# Altium PCB AFE.PcbDoc
Units mm, origin at the board's own origin, x right, y up, seen from the top; angles counter-clockwise.
Board outline 34.75 x 42.75 mm, 4 copper layers (Top layer, Ground, Power, Bottom Layer), stack 1.586 mm thick; 61 components, 37 nets, 155 pads, 295 vias.
Unrouted connection lines stored in the file: 1.
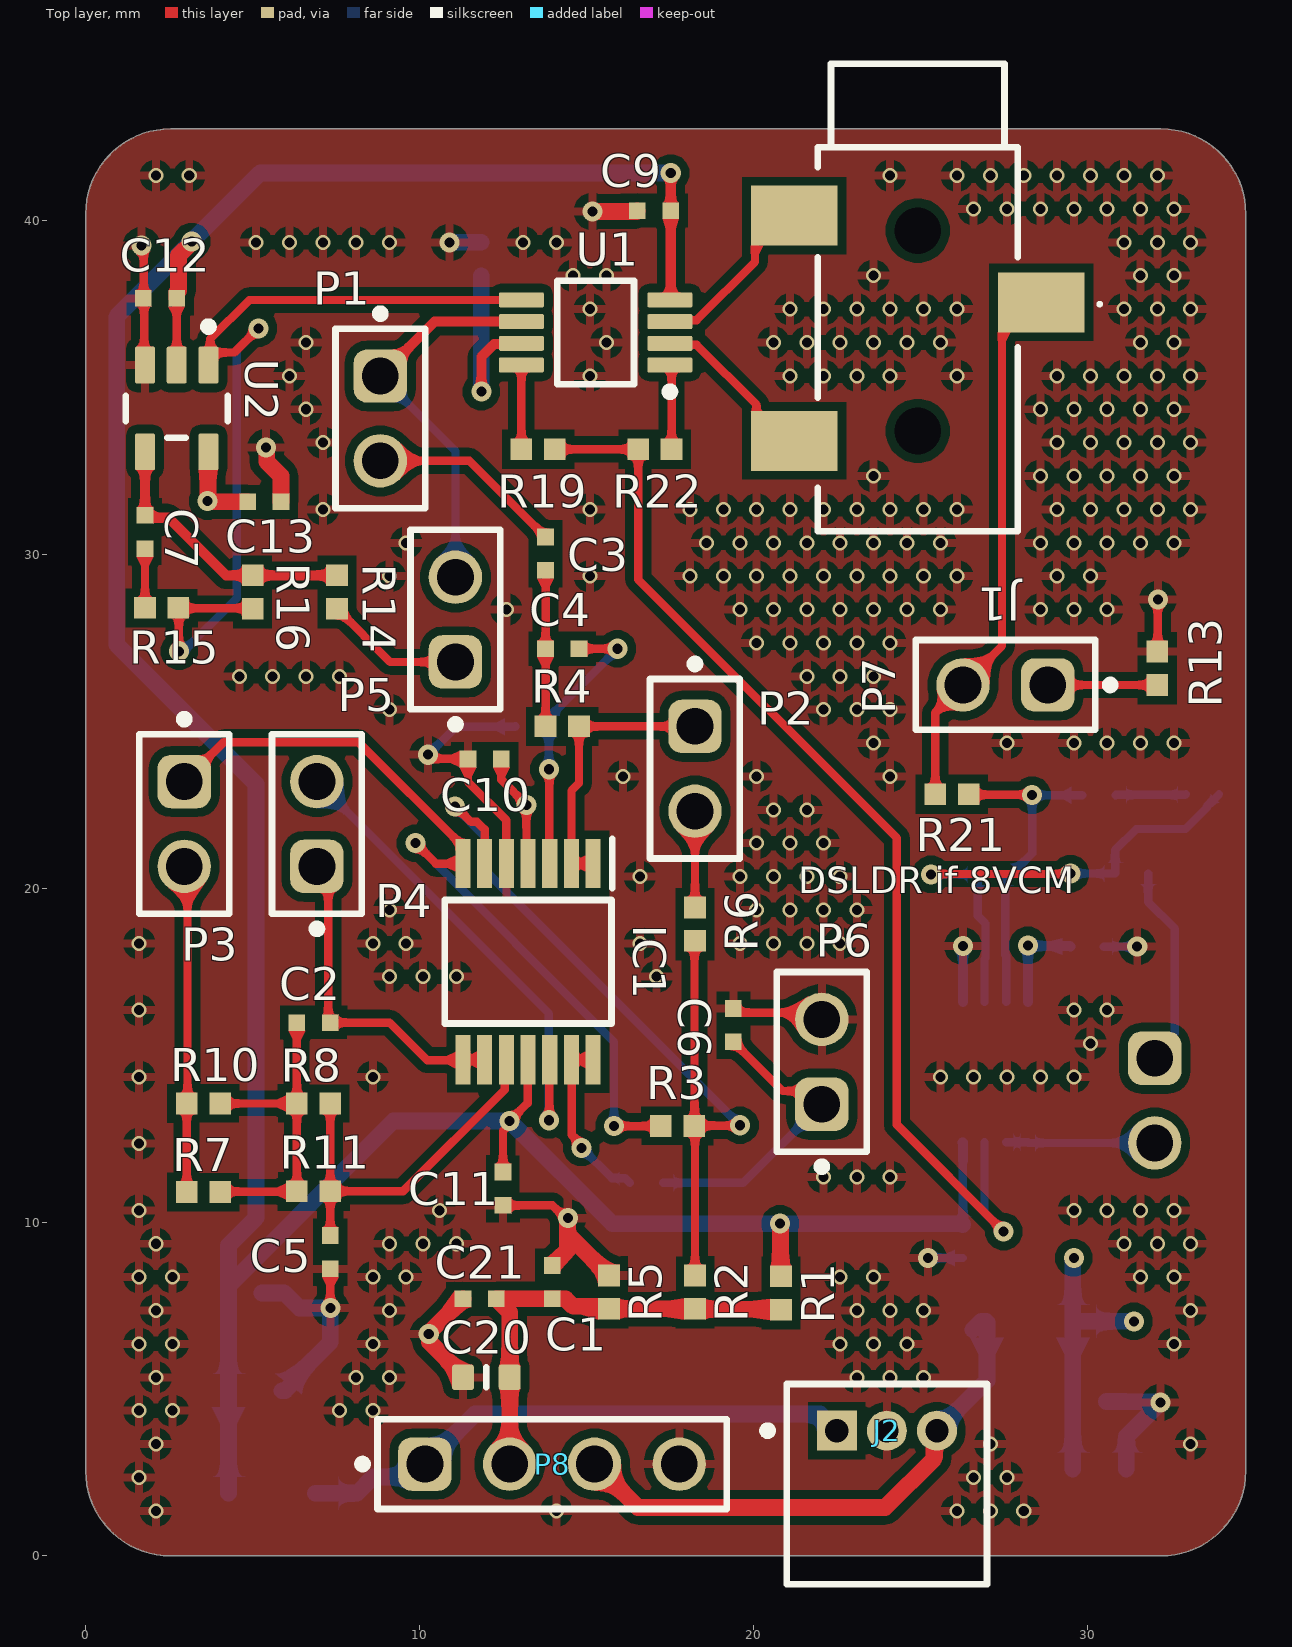
[diagram p0: Top layer view]
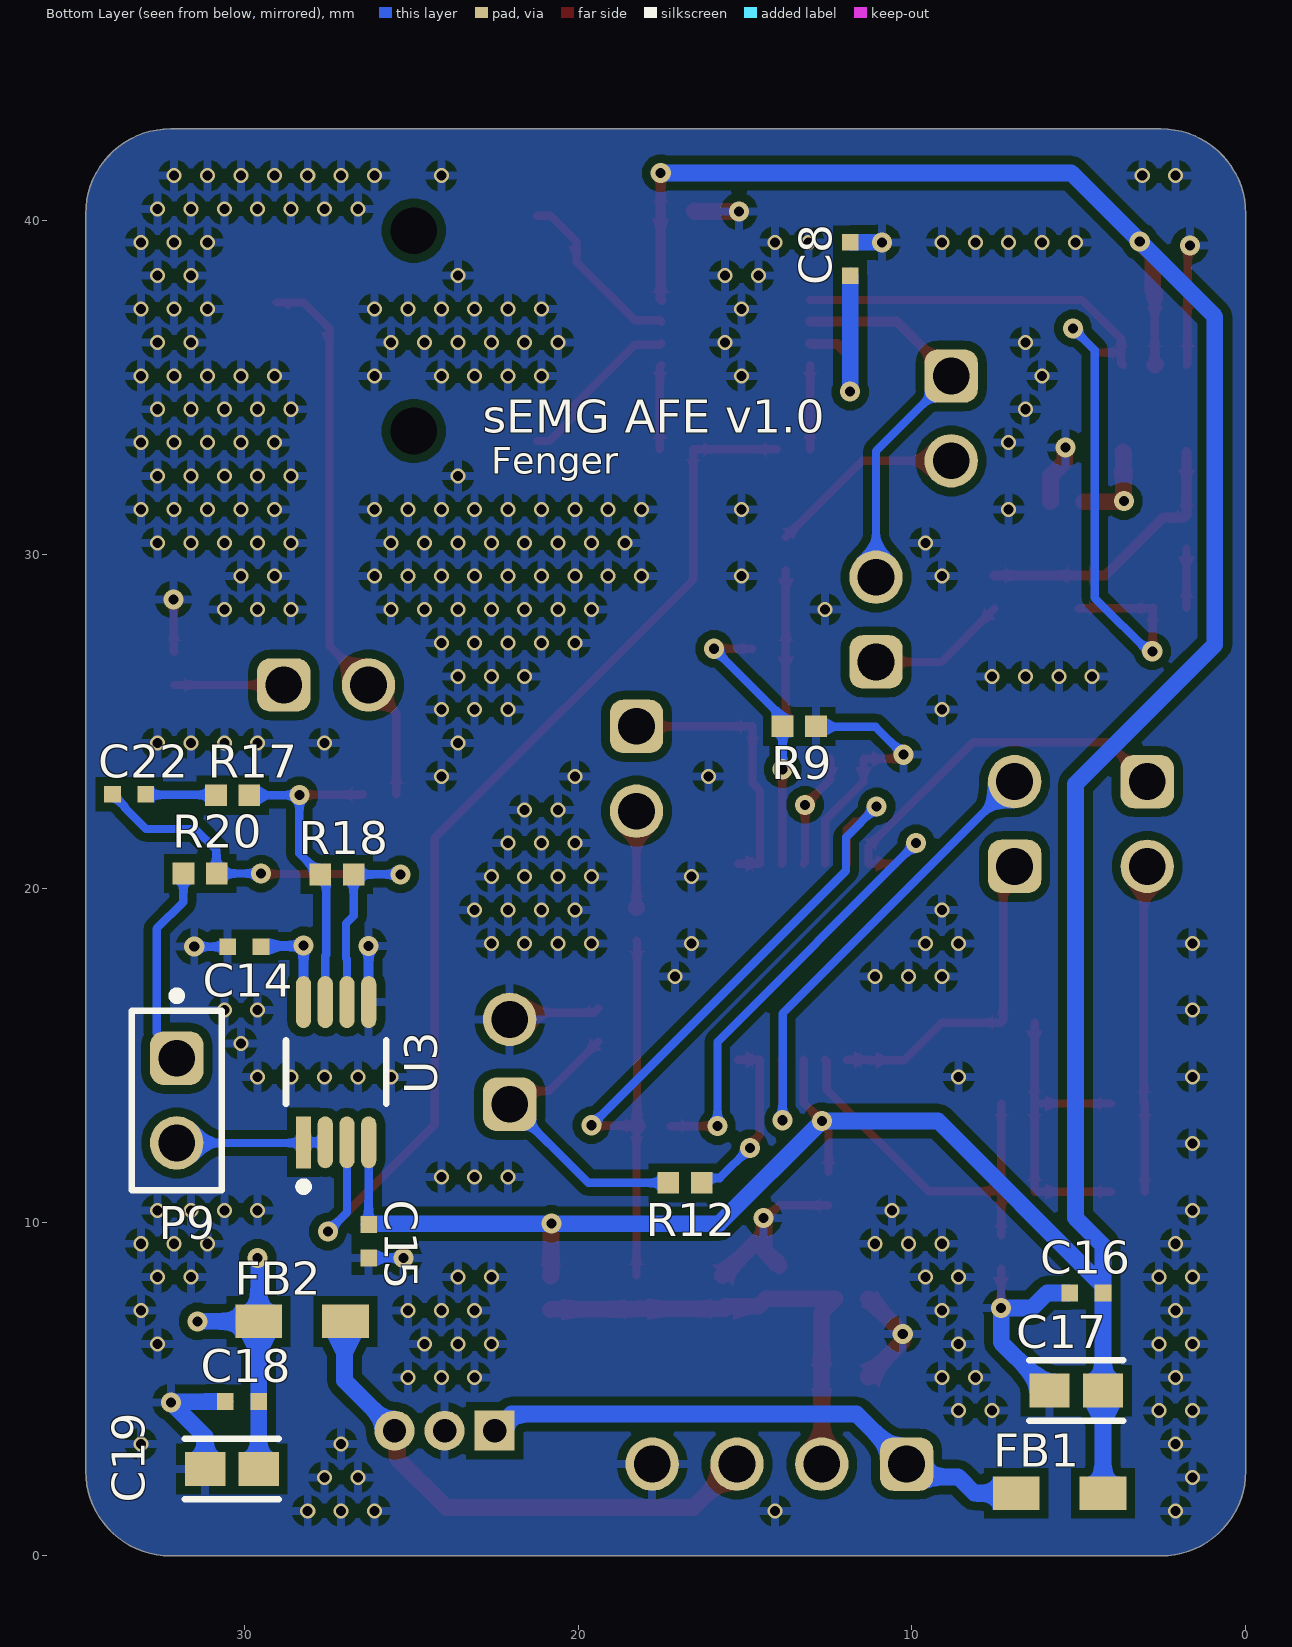
[diagram p1: Bottom Layer view, seen from below]
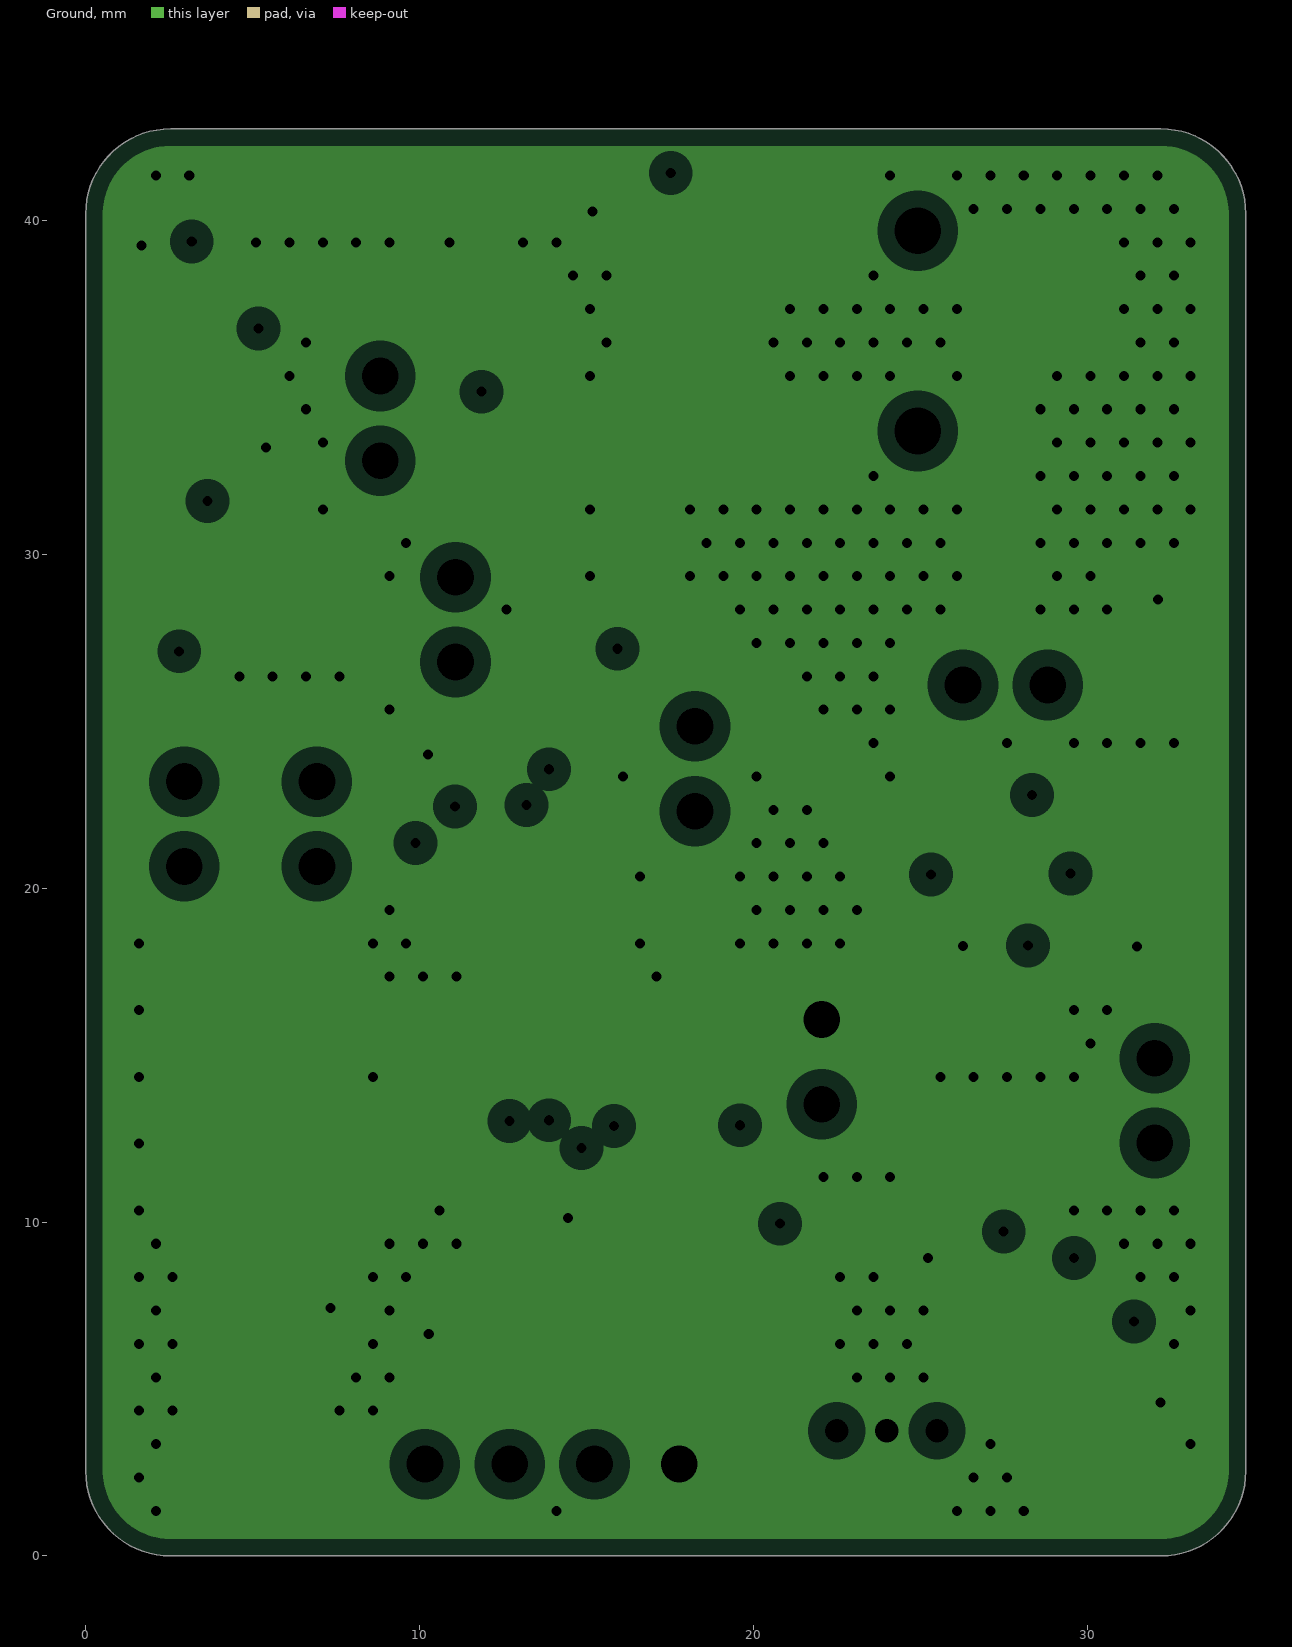
[diagram p2: Ground, clearances drawn from the general rule]
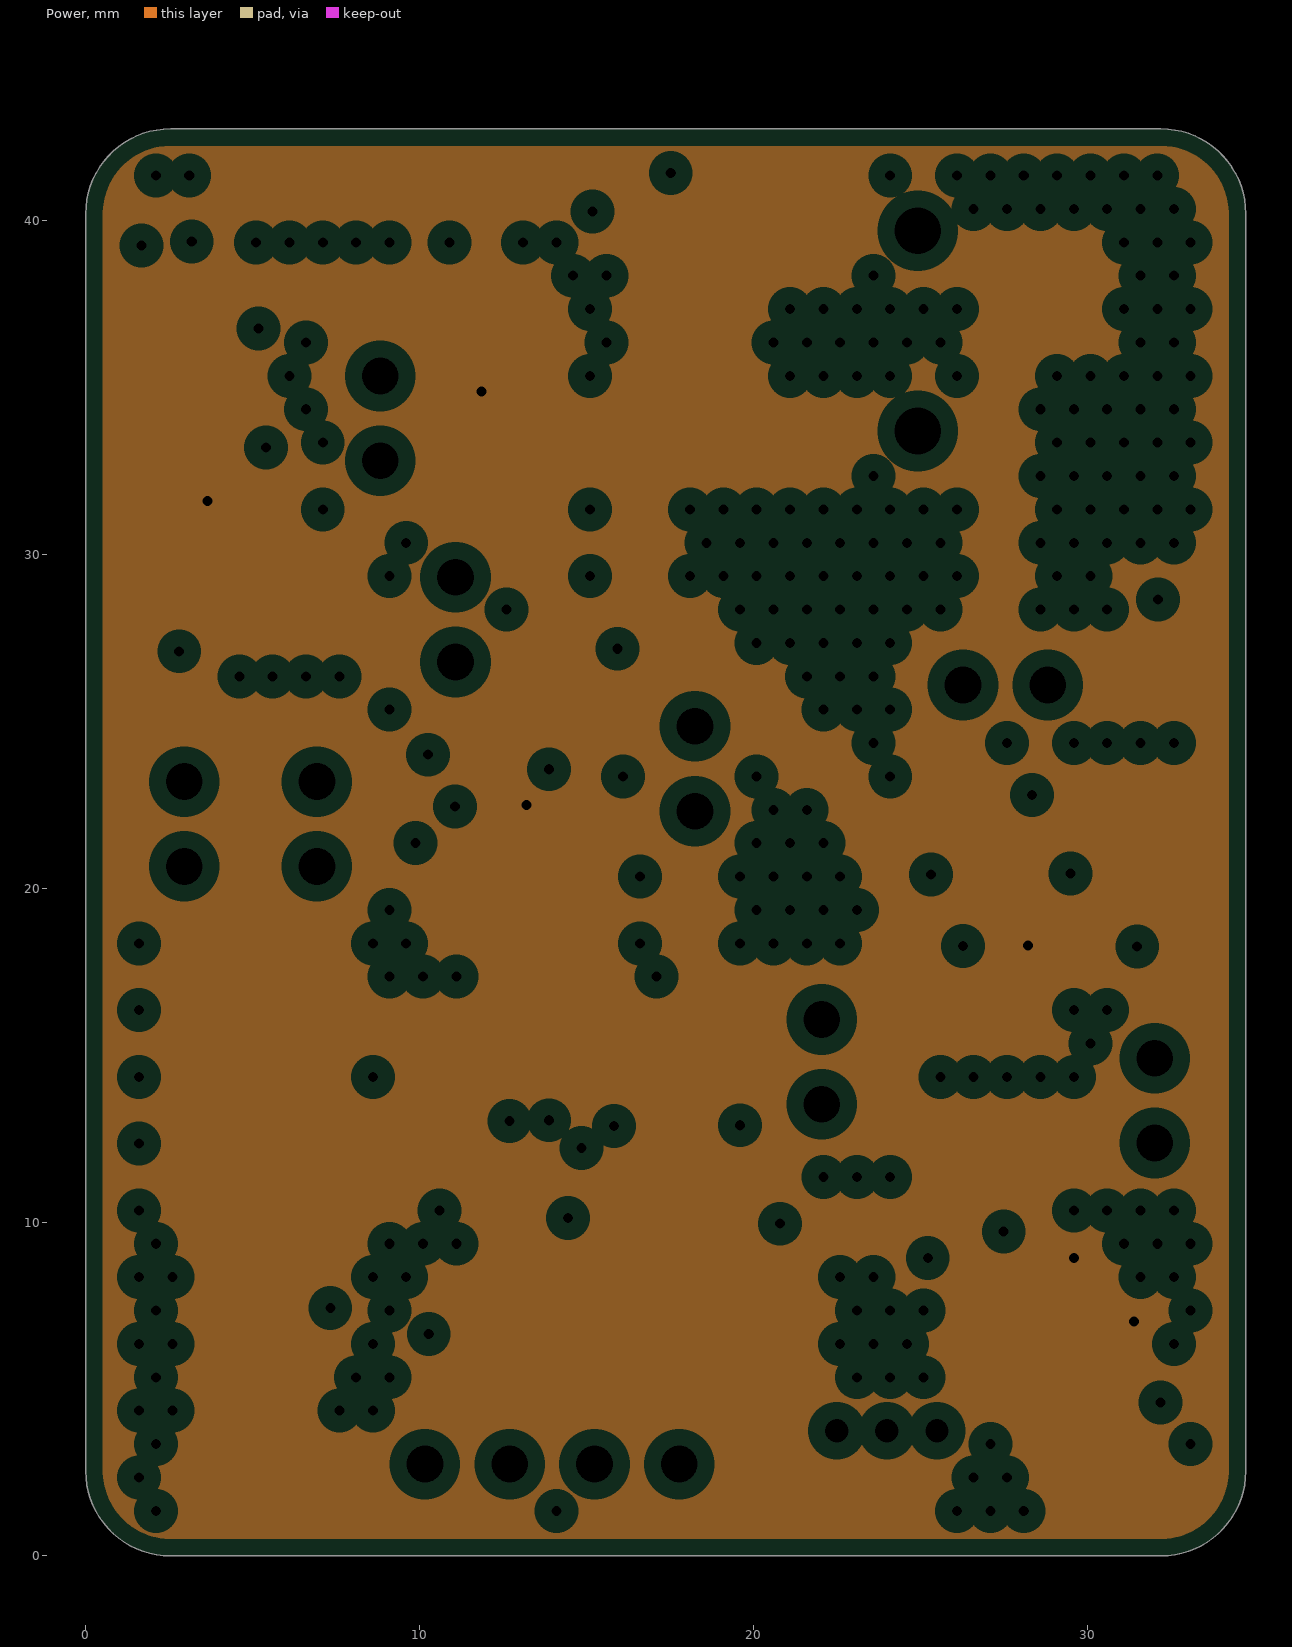
[diagram p3: Power, clearances drawn from the general rule]
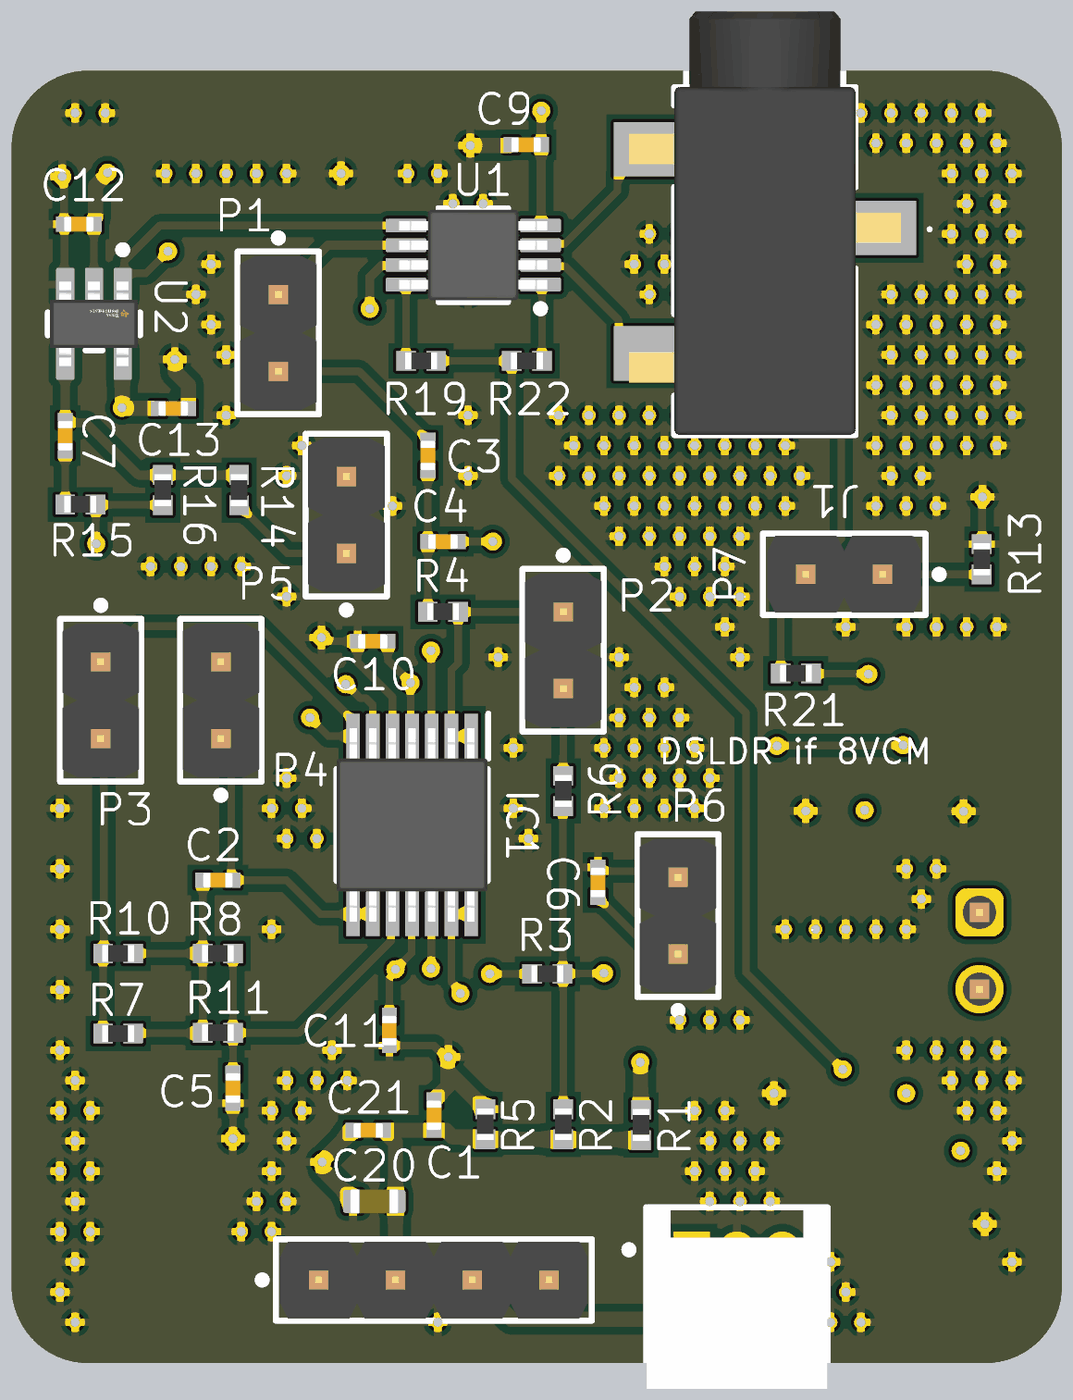
[diagram p4: 3D render of the assembled board from above, using the file's embedded part models]
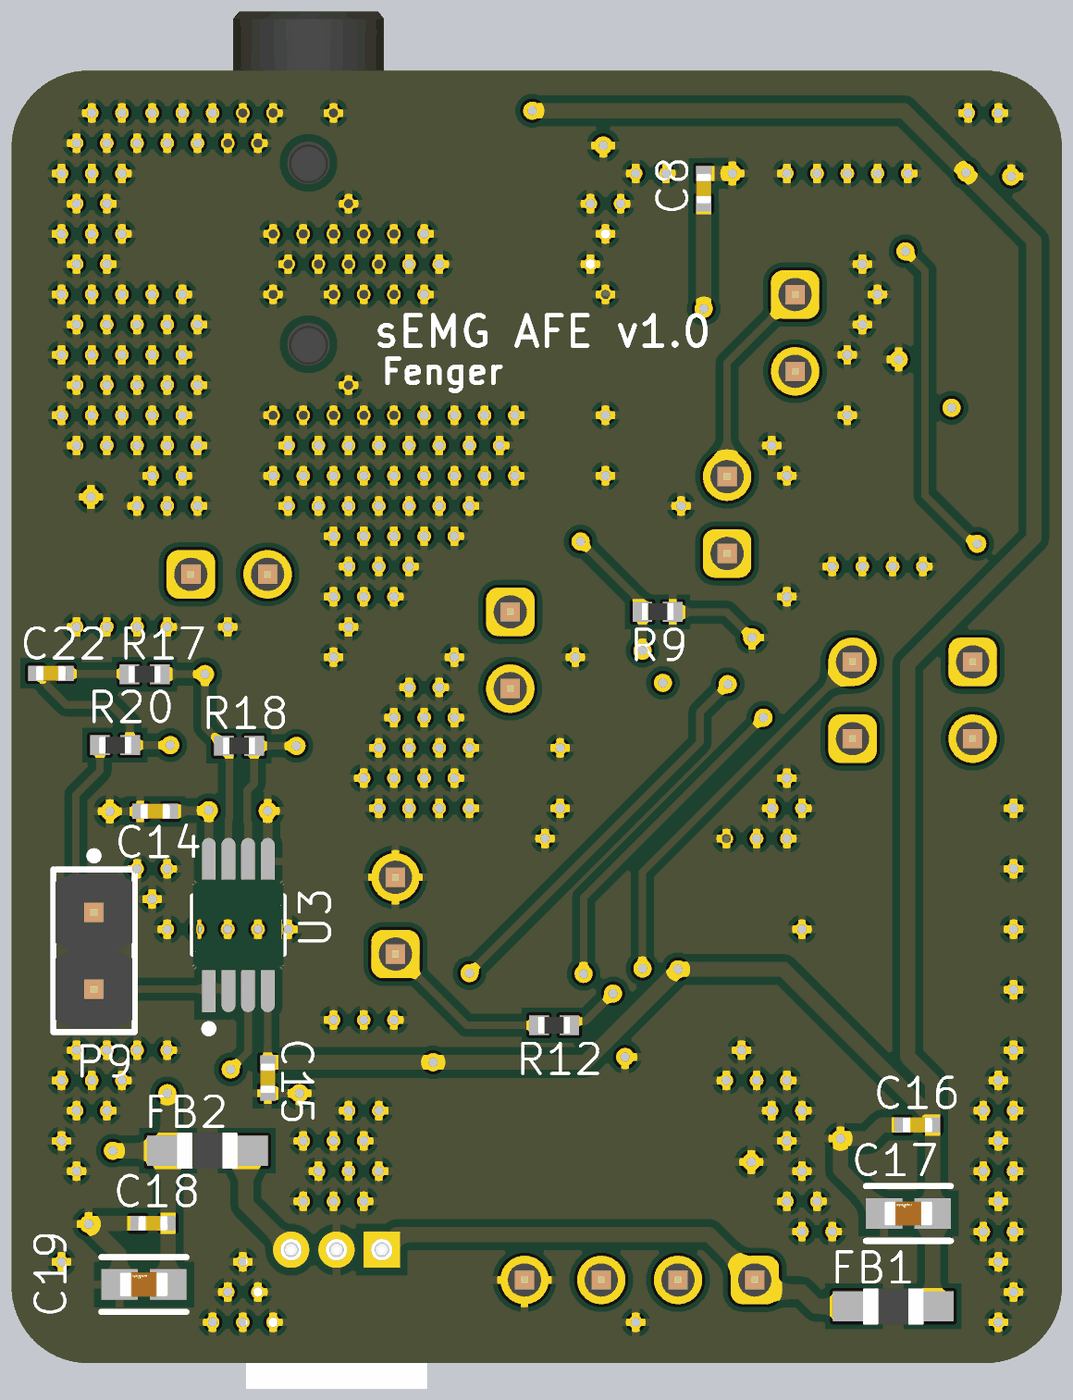
[diagram p5: 3D render of the assembled board from below, using the file's embedded part models]

## Layer stack, top to bottom
Top Solder: solder mask 0.0102, Solder Resist, Dk 3.5
Top layer: signal copper 0.035
Dielectric 2: prepreg 0.2104, PP-006, Dk 4.1
Ground: plane copper 0.0152, net GND
Dielectric 1: core 1.065, FR-4, Dk 4.6
Power: plane copper 0.0152, net +2.5V
Dielectric 3: prepreg 0.2104, PP-006, Dk 4.1
Bottom Layer: signal copper 0.035
Bottom Solder: solder mask 0.0102, Solder Resist, Dk 3.5

## Board outline
0,40.21 cw(c2.54,40.21) 2.54,42.75 32.21,42.75 cw(c32.21,40.21) 34.75,40.21 34.75,2.54 cw(c32.21,2.54) 32.21,0 2.54,0 cw(c2.54,2.54) 0,2.54 0,29.25

## Design rules (kind name [scope] priority, off if disabled: settings)
Clearance [All] p1: gap=0.254 ignorepadtopadclearanceinfootprint=FALSE except(0.192: SMDPad-SMDPad)
MinimumSolderMaskSliver [All] p1: minsoldermaskwidth=0.1
PlaneClearance [All] p1: clearance=0.508
PlaneConnect [All] p1: planeconnectstyle=Direct reliefexpansion=0.508 reliefentries=4 reliefconductorwidth=0.254 reliefairgap=0.254
PolygonConnect [All] p1: connectstyle=Relief reliefconductorwidth=0.254 reliefentries=4 polygonreliefangle="90 Angle" airgapwidth=0.254
RoutingVias [All] p1: holewidth=0.3 width=0.6 viastyle="Through Hole" minholewidth=0.15 minwidth=0.25 maxholewidth=1 maxwidth=1
SilkToSilkClearance [All] p1: silktosilkclearance=0.15
SilkToSolderMaskClearance [IsPad] p1: minsilkscreentomaskgap=0.15 clearancetoexposedcopper=TRUE
SolderMaskExpansion [All] p1: expansion=0.102 istentingtop=FALSE
SupplyNets "Schematic Supply Nets_1" [InNet('-2.5V')] p1: voltage=0.000
SupplyNets "Schematic Supply Nets" [InNet('+2.5V')] p2: voltage=0.000
SupplyNets "Schematic Supply Nets_7" [InNet('-1.25V_IN')] p3: voltage=0.000
SupplyNets "Schematic Supply Nets_2" [InNet('GND')] p4: voltage=0.000
Width [All] p1: maxlimit=1 minlimit=0.1 preferedwidth=0.25 minimp=50.000000 maximp=50.000000 favimp=50.000000
25 further rules are at their usual default settings.

## Classes and differential pairs
component class AFE_Power: C16 C17 C18 C19 C20 C21 FB1 FB2 J2 P8
component class AFE_Main: C1 C2 C3 C4 C5 C6 C7 C8 C9 C10 C11 C12 C13 IC1 J1 P1 P2 P3 P4 P5 P6 P7 R1 R2 R3 R4 R5 R6 R7 R8 R9 R10 R11 R12 R13 R14 R15 R16 U1 U2
component class AFE_DRL: C14 C15 C22 P9 R17 R18 R19 R20 R21 R22 U3

## Components (designator, comment, footprint, x,y, rotation, side; value= is the part's Value field where it differs from the comment)
C1 "100n" WCAP-CSGP_0402_L1W0.5H0.5 13.975,8.2 r270 top
C2 "20.5n" WCAP-CSGP_0402_L1W0.5H0.5 6.825,15.975 r0 top
C3 "82n" WCAP-CSGP_0402_L1W0.5H0.5 13.775,30.025 r270 top
C4 "82n" WCAP-CSGP_0402_L1W0.5H0.5 14.275,27.175 r0 top
C5 "10n" WCAP-CSGP_0402_L1W0.5H0.5 7.325,9.1 r270 top
C6 "0" WCAP-CSGP_0402_L1W0.5H0.5 19.4,15.9 r270 top
C7 "1u" WCAP-CSGP_0402_L1W0.5H0.5 1.775,30.675 r90 top
C8 "100n" WCAP-CSGP_0402_L1W0.5H0.5 11.85,38.85 r90 bottom
C9 "100n" WCAP-CSGP_0402_L1W0.5H0.5 17.025,40.3 r0 top
C10 "100n" WCAP-CSGP_0402_L1W0.5H0.5 11.95,23.875 r180 top
C11 "100n" WCAP-CSGP_0402_L1W0.5H0.5 12.5,11 r270 top
C12 "100n" WCAP-CSGP_0402_L1W0.5H0.5 2.225,37.675 r180 top
C13 "100n" WCAP-CSGP_0402_L1W0.5H0.5 5.35,31.575 r180 top
C14 "100n" WCAP-CSGP_0402_L1W0.5H0.5 30,18.25 r0 bottom
C15 "100n" WCAP-CSGP_0402_L1W0.5H0.5 26.275,9.425 r90 bottom
C16 "1u" WCAP-CSGP_0402_L1W0.5H0.5 4.775,7.875 r180 bottom
C17 "10uF" FP-GRM188-0_1-e0_2_0_55-IPC_A 5.077,4.95 r0 bottom
C18 "1u" WCAP-CSGP_0402_L1W0.5H0.5 30.071,4.625 r180 bottom
C19 "10uF" FP-GRM188-0_1-e0_2_0_55-IPC_A 30.373,2.6 r0 bottom
C20 "Capacitor 10µF +/-20% 10V 0603" CAPC0603(1608)100_L 12,5.35 r0 top value=10µF
C21 "1u" WCAP-CSGP_0402_L1W0.5H0.5 11.8,7.7 r0 top
C22 "1n" WCAP-CSGP_0402_L1W0.5H0.5 33.45,22.815 r0 bottom
FB1 "742792097" WE-CBF_0805_L2W1.2H0.9_HC 5.575,1.875 r180 bottom
FB2 "742792097" WE-CBF_0805_L2W1.2H0.9_HC 28.271,7.025 r0 bottom
IC1 "OPA4387PWR" SOP65P640X120-14N 13.25,17.8 r270 top
J1 "35RASMT2BHSNTRX" 35RASMT2BHSNTRX 24.925,37.7 r270 top
J2 "S3B-ZR(LF)(SN)" FP-S3B-ZR_LF_SN-MFG 24,2.15 r0 top
P1 "61300211121" 61300211121 8.825,34.075 r270 top
P2 "61300211121" 61300211121 18.25,23.58 r270 top
P3 "61300211121" 61300211121 2.95,21.925 r270 top
P4 "61300211121" 61300211121 6.925,21.925 r90 top
P5 "61300211121" 61300211121 11.075,28.05 r90 top
P6 "61300211121" 61300211121 22.05,14.8 r90 top
P7 "61300211121" 61300211121 27.55,26.09 r180 top
P8 "61300411121" 61300411121 13.97,2.75 r0 top
P9 "61300211121" 61300211121 32.025,13.64 r270 bottom
R1 "Resistor 4k7 +/-1% 0402 63 mW" RESC1005X40X25ML05T05 20.825,7.875 r270 top value=4k
R2 "Resistor 4k7 +/-1% 0402 63 mW" RESC1005X40X25ML05T05 18.25,7.9 r270 top value=47k
R3 "Resistor 4k7 +/-1% 0402 63 mW" RESC1005X40X25ML05T05 17.725,12.875 r0 top value=47k
R4 "Resistor 4k7 +/-1% 0402 63 mW" RESC1005X40X25ML05T05 14.275,24.85 r180 top value=68.7k
R5 "Resistor 4k7 +/-1% 0402 63 mW" RESC1005X40X25ML05T05 15.675,7.9 r90 top value=4k
R6 "Resistor 4k7 +/-1% 0402 63 mW" RESC1005X40X25ML05T05 18.25,18.925 r90 top value=1.21k
R7 "Resistor 4k7 +/-1% 0402 63 mW" RESC1005X40X25ML05T05 3.525,10.9 r180 top value=4.75k
R8 "Resistor 4k7 +/-1% 0402 63 mW" RESC1005X40X25ML05T05 6.825,13.55 r180 top value=6.49k
R9 "Resistor 4k7 +/-1% 0402 63 mW" RESC1005X40X25ML05T05 13.375,24.85 r0 bottom value=137k
R10 "Resistor 4k7 +/-1% 0402 63 mW" RESC1005X40X25ML05T05 3.525,13.55 r180 top value=0
R11 "Resistor 4k7 +/-1% 0402 63 mW" RESC1005X40X25ML05T05 6.825,10.925 r180 top value=0
R12 "Resistor 4k7 +/-1% 0402 63 mW" RESC1005X40X25ML05T05 16.8,11.175 r180 bottom value=0
R13 "Resistor 4k7 +/-1% 0402 63 mW" RESC1005X40X25ML05T05 32.1,26.59 r90 top value=1Meg
R14 "Resistor 4k7 +/-1% 0402 63 mW" RESC1005X40X25ML05T05 7.525,28.875 r270 top value=100k
R15 "Resistor 4k7 +/-1% 0402 63 mW" RESC1005X40X25ML05T05 2.275,28.4 r0 top value=0
R16 "Resistor 4k7 +/-1% 0402 63 mW" RESC1005X40X25ML05T05 5,28.875 r270 top value=0
R17 "Resistor 4k7 +/-1% 0402 63 mW" RESC1005X40X25ML05T05 30.35,22.785 r0 bottom value=0
R18 "Resistor 4k7 +/-1% 0402 63 mW" RESC1005X40X25ML05T05 27.225,20.415 r180 bottom value=1Meg
R19 "Resistor 4k7 +/-1% 0402 63 mW" RESC1005X40X25ML05T05 13.55,33.15 r180 top value=10k
R20 "Resistor 4k7 +/-1% 0402 63 mW" RESC1005X40X25ML05T05 31.325,20.44 r180 bottom value=10k
R21 "Resistor 4k7 +/-1% 0402 63 mW" RESC1005X40X25ML05T05 25.95,22.815 r180 top value=1Meg
R22 "Resistor 4k7 +/-1% 0402 63 mW" RESC1005X40X25ML05T05 17.05,33.15 r0 top value=10k
U1 "INA333AIDGKR" DGK0008A_N 15.275,36.65 r180 top
U2 "OPA387DBVR" FP-DBV0005A-MFG 2.725,34.375 r270 top
U3 "OPA2387DGKR" FP-DGK0008A-IPC_B 27.25,14.49 r90 bottom

## Footprints (in the part's own frame and the unit in brackets; to place one, negate y for a bottom-side part, rotate by r counter-clockwise, add the part's x,y. Pads: shape width x height; smd on the part's side, far side on the other; paste and mask are expansions set on the pad)
35RASMT2BHSNTRX [mm]
  rect 1.8x2.6 smd: 1(0.15,3.7) 4(4.3,-3.7) 5(-2.45,-3.7)
  round 0.7 hole 1.4 unplated: MH1(4,0) MH2(-2,0)
  silkscreen extent -7,-3 7,5.5, body extent -7,-4.5 7,4.5, height 5.18
61300211121 [mm] "Pin Header, pitch 2.54 mm, THT, Vertical, single row, 2p"
  rrect50% 1.6x1.6 hole 1.1: 1(-1.27,0)
  round 1.6 hole 1.1: 2(1.27,0)
  silkscreen extent -3.26,-1.35 2.69,1.35, body extent -2.54,-1.27 2.54,1.27, height 8.57
61300411121 [mm] "Pin Header, pitch 2.54 mm, THT, Vertical, single row, 4p"
  rrect50% 1.6x1.6 hole 1.1: 1(-3.81,0)
  round 1.6 hole 1.1: 2(-1.27,0) 3(1.27,0) 4(3.81,0)
  silkscreen extent -5.8,-1.35 5.23,1.35, body extent -5.08,-1.27 5.08,1.27, height 8.57
CAPC0603(1608)100_L [mm] "Chip Capacitor, Body 1.6x0.8mm, Height 1.0mm, IPC High Density"
  rrect25% 0.66x0.76 smd: 1(-0.7,0) 2(0.7,0)
  silkscreen extent 0,-0.3 0,0.3, body extent -0.8,-0.4 0.8,0.4, height 0.95
DGK0008A_N [mm] "TSOP, 8-Leads, Body 3.1x3.1mm, Pitch 0.65mm, IPC Medium Density"
  rrect22% 1.35x0.45 smd: 1(-2.225,0.975) 2(-2.225,0.325) 3(-2.225,-0.325) 4(-2.225,-0.975) 5(2.225,-0.975) 6(2.225,-0.325) 7(2.225,0.325) 8(2.225,0.975)
  silkscreen extent -2.35,-1.55 1.15,1.9, body extent -2.45,-1.5 2.45,1.5, height 0.94
FP-DBV0005A-MFG [mm]
  rrect17% 1.1x0.6 smd paste+0 mask+0: 1(-1.3,0.95) 2(-1.3,0) 3(-1.3,-0.95) 4(1.3,-0.95) 5(1.3,0.95)
  silkscreen extent -2.57,-1.53 0.87,1.53, body extent -1.95,-1.78 1.95,1.78, height 0.25
FP-DGK0008A-IPC_B [mm]
  rect 1.557x0.458 smd paste+0 mask+0: 1(-2.101,0.975)
  rrect100% 1.557x0.458 smd paste+0 mask+0: 2(-2.101,0.325) 3(-2.101,-0.325) 4(-2.101,-0.975) 5(2.101,-0.975) 6(2.101,-0.325) 7(2.101,0.325) 8(2.101,0.975)
  silkscreen extent -3.55,-1.5 0.95,1.5, body extent -2.45,-1.5 2.45,1.5, height 1.1
FP-GRM188-0_1-e0_2_0_55-IPC_A [mm]
  rect 1.208x1.012 smd paste+0 mask+0: 1(-0.802,0) 2(0.802,0)
  silkscreen extent -1.41,-0.91 1.41,0.91, body extent -0.8,-0.4 0.8,0.4, height 0.9
FP-S3B-ZR_LF_SN-MFG [mm]
  rect 1.2x1.2 hole 0.7 paste-2539.97 mask+0: 1(-1.5,1.6)
  round 1.2 hole 0.7 paste-2539.97 mask+0: 2(0,1.6) 3(1.5,1.6)
  silkscreen extent -3.7,-3 3,3, body extent -3.1,-3.1 3.1,3.1, height 0.25
RESC1005X40X25ML05T05 [mm] "Chip Resistor, 2-Leads, Body 1.05x0.55mm, IPC Low Density"
  rect 0.65x0.65 smd: 1(-0.5,0) 2(0.5,0)
  body extent -0.53,-0.28 0.53,0.28, height 0.4
SOP65P640X120-14N [mm]
  rect 1.475x0.45 smd: 1(-2.938,1.95) 2(-2.938,1.3) 3(-2.938,0.65) 4(-2.938,0) 5(-2.938,-0.65) 6(-2.938,-1.3) 7(-2.938,-1.95) 8(2.938,-1.95) 9(2.938,-1.3) 10(2.938,-0.65) 11(2.938,0) 12(2.938,0.65) 13(2.938,1.3) 14(2.938,1.95)
  silkscreen extent -3.67,-2.5 1.85,2.52, body extent -3.2,-2.5 3.2,2.5, height 1.13
WCAP-CSGP_0402_L1W0.5H0.5 [mm] "Ceramic Capacitors, body 1x0.5mm"
  rect 0.5x0.5 smd: 1(-0.5,0) 2(0.5,0)
  body extent -0.5,-0.25 0.5,0.25, height 0.5
WE-CBF_0805_L2W1.2H0.9_HC [mm] "SMD EMI Suppression Ferrite  Bead, body 2.00x1.20mm"
  rect 1.4x1 smd: 1(-1.3,0) 2(1.3,0)
  body extent -1,-0.6 1,0.6, height 0.9

## Part data
C1 C2 C3 C4 C5 C6 C7 C8 C9 C10 C11 C12 C13 C14 C15 C16 C18 C21 C22: library part CMP-207839-000017-2, "CAP CER 10000PF 50V X7R 0402", Capacitance=10nF, Case Code (Imperial)=0402, Case Code (Metric)=1005, Dielectric=X7R, Insulation Resistance=10GΩ, Max Operating Temperature=125°C, Min Operating Temperature=-55°C, Tolerance=10%, Voltage Rating=50V, Case/Package=0402, Height=500µm, Length=1mm, Material=Ceramic, Mount="Surface Mount", NexarPartId=53703204, Packaging="Tape & Reel (TR)", REACH SVHC=Unknown, RoHS=Compliant, Thickness=558.8µm, Voltage Rating (DC)=50V, Width=500µm
C17 C19: library part CMP-2006-02792-2, "Chip Multilayer Ceramic Capacitors for General Purpose, 0603, 10uF, X5R, 15%, 20%, 6.3V", Case Code (Imperial)=0603, Case Code (Metric)=1608, Dielectric=X5R, Max Operating Temperature=85°C, Min Operating Temperature=-55°C, Package Quantity=4000, Tolerance=20%, Voltage=6.3V, Capacitance=10uF, Case/Package=0603, Depth=0.8mm, Height=0.8mm, Lead Free="Lead Free", Length=1.6mm, Material=Ceramic, Mount="Surface Mount", Packaging="Tape and Reel", Radiation Hardening=No, REACH SVHC="No SVHC", Termination=SMD/SMT, Thickness=0.035inch, Voltage Rating=6.3V, Voltage Rating (DC)=6.3V, Width=0.031inch
C20: library part CMP-001-00075-4, "Chip Capacitor, 10µF +/-20%, 10V, 0603, Thickness 1 mm", Case/Package=0603, Max Operating Temperature=85°C, Min Operating Temperature=-55°C, Tolerance=10%, Voltage Rating=10V, Mounting Technology=SMT, Pins=2
FB1 FB2: library part CMP-0220-00149-3, Case Code (Imperial)=0805, Case Code (Metric)=2012, Current Rating=1A, DC Resistance (DCR)=300mΩ, Inductance=1.8nH, Max Operating Temperature=125°C, Min Operating Temperature=-55°C, Test Frequency=100MHz, Tolerance=25%, Case/Package=0805, Core Material=Ferrite, Depth=1.2mm, Height=900µm, Impedance=1.5kΩ, Lead Free="Lead Free", Length=2mm, Material=Ferrite, Max Current Rating=1A, Max DC Current=1A, Mount="Surface Mount", NexarPartId=22803129, Number of Lines=1, Packaging=Digi-Reel®, REACH SVHC=Unknown, Resistance=300mΩ, RMS Current (Irms)=1A, RoHS=Compliant, Series Resistance=300mΩ, Termination=SMD/SMT, Weight=10.999615mg, Width=1.2mm
IC1: "Integrated Circuit", Manufacturer_Name="Texas Instruments", Mouser Part Number=595-OPA4387PWR, Arrow Part Number=OPA4387PWR, Arrow Price/Stock=https://www.arrow.com/en/products/opa4387pwr/texas-instruments?region=nac, Datasheet Link=https://www.ti.com/lit/ds/symlink/opa4387.pdf?ts=1647260978388&ref_url=https%253A%252F%252Fwww.ti.com%252Fproduct%252FOPA4387%253FkeyMatch%253DOPA4387PWT%2526tisearch%253Dsearch-everything%2526usecase%253DOPN, Height=1.2mm, Manufacturer_Part_Number=OPA4387PWR, Mouser Price/Stock=https://www.mouser.co.uk/ProductDetail/Texas-Instruments/OPA4387PWR?qs=doiCPypUmgHWEYR9FZXdjQ%3D%3D
J1: "Connector", Manufacturer_Name=Switchcraft, Mouser Part Number=502-35RASMT2BHSNTRX, Datasheet Link=https://www.switchcraft.com/assets/1/24/35RASMT2BHSNTRX_CD.pdf, Height=5.1mm, Manufacturer_Part_Number=35RASMT2BHSNTRX, Mouser Price/Stock=https://www.mouser.co.uk/ProductDetail/Switchcraft/35RASMT2BHSNTRX?qs=Li%252BoUPsLEnu6MywKCFGumw%3D%3D
J2: library part CMP-17439-000198-1, "CONN HEADER R/A 3POS 1.5MM", Color=White, Contact Resistance=30mR, Current Rating=1A, Flammability Rating="UL94 V-0", Housing Color=Beige, Insulation Color=Natural, Insulation Resistance=500MR, Max Operating Temperature=85°C, Max Voltage Rating (AC)=50V, Min Operating Temperature=-25°C, Body Plating=Tin, Connector Type=Header, Contact Finish - Mating=TIN, Contact Material=Brass, Contact Mating Length=0.094inch, Contact Plating=Tin, Contact Shape=Circular, Contact Type="Male Pin", Depth=6mm, Fastening Type=Detent, Gender=Male, Height=7.2mm, Housing Material=Polyamide, Insulation Material=Nylon, Lead Free="Lead Free", Lead Pitch=1.5mm, Length=6mm, Material=Nylon, Max Current Rating=1A, Mount="Through Hole", Number of Contacts=3, Number of Pins=3, Number of Positions=3, Number of Rows=1, Orientation="Right Angle", Packaging=Bulk, Panel Thickness=3.5mm, Pitch=1.5mm, REACH SVHC="No SVHC", Series=ZH, Termination=Solder, Voltage Rating=50V, Voltage Rating (AC)=50V, Voltage Rating (DC)=50V, Width=3.5mm
P1 P2 P3 P4 P5 P6 P7 P9: library part CMP-1712-00002-6, Color=Black, Contact Resistance=20mΩ, Current Rating=3A, Max Operating Temperature=125°C, Min Operating Temperature=-40°C, Operating Supply Voltage=250V, Connector Type="Male Pin", Contact Gender=Male, Contact Material=Copper, Contact Mating Length=5.9944mm, Contact Plating=Gold, Gender=Male, Height=8.94mm, Housing Material=PBT, Lead Free="Lead Free", Lead Pitch=2.54mm, Mount="Through Hole", NexarPartId=20081794, Number of Contacts=2, Number of Pins=2, Number of Positions=2, Number of Rows=1, Orientation=Vertical, Packaging=Bulk, Pitch=2.54mm, REACH SVHC="No SVHC", RoHS=Compliant, Termination="Through Hole", Voltage Rating=250V
P8: library part CMP-1502-01064-3, Color=Black, Contact Resistance=20mΩ, Current Rating=3A, Max Operating Temperature=105°C, Min Operating Temperature=-40°C, Operating Supply Voltage=250V, Connector Type="Male Pin", Contact Material=Copper, Contact Mating Length=5.9944mm, Contact Plating=Gold, Gender=Male, Height=8.89mm, Lead Free="Lead Free", Lead Pitch=2.54mm, Mount="Through Hole", NexarPartId=32855522, Number of Contacts=4, Number of Pins=4, Number of Positions=4, Number of Rows=1, Orientation=Vertical, Packaging=Bulk, Pitch=2.54mm, REACH SVHC=Unknown, RoHS=Compliant, Termination=Solder, Voltage Rating=250V
R1 R2 R3 R4 R5 R6 R7 R8 R9 R10 R11 R12 R13 R14 R15 R16 R17 R18 R19 R20 R21 R22: library part CMP-009-00034-5, "Chip Resistor, 4.7 KOhm, +/- 1%, 63 mW, -55 to 155 degC, 0402 (1005 Metric)", Case/Package=0402, Max Operating Temperature=155°C, Min Operating Temperature=-55°C, Power=63mW, Tolerance=1%, Voltage Rating=50V, Mounting Technology=SM, Pins=2, RoHS Compliant=True
U1: library part CMP-0944-00088-2, "Low Power, Precision Instrumentation Amplifier, -40 to 125 degC, 8-pin SOP (DGK8), Green (RoHS & no Sb/Br)", Input Bias Current (+/-)(Max)(nA)=0.2, Manufacturer="Texas Instruments", Quiescent Current (+/-)(Typ)(mA)=0.05, CMRR(Min)(dB)=100, Code_JEDEC=MO-187, ComponentLink1Description="Manufacturer URL", ComponentLink1URL=http://www.ti.com/, ComponentLink2Description=Datasheet, ComponentLink2URL=http://www.ti.com/general/docs/lit/getliterature.tsp?genericPartNumber=INA333&fileType=pdf, ComponentLink3Description="Package Specification", ComponentLink3URL=http://www.ti.com/litv/pdf/mpds028d, DatasheetVersion=SBOS445B, Eco-Plan="Green (RoHS & no Sb/Br)", Gain(V/V)="1 to 1000", Input Offset (+/-)(Max)(uV)=25, Input Offset Drift (+/-)(Max)(uV/Degrees Celsius)=0.1, Mounting Technology="Surface Mount", Noise at 1kHz(Typ)(nV/rt(Hz))=50, Number of Channels=1, Output Offset (+/-)(Max)(uV)=75/G, Output Offset Drift (+/-)(Max)(uV/Degrees Celsius)=0.5/G, PackageDescription="8-Pin Thin Small Outline, Body 3 x 3 mm, Pitch 0.65 mm", PackageReference=DGK0008A, PackageVersion="4073329/E, 05/2006", PartNumber=INA333AIDGKR, SubFamily="Single Supply", Vs(Max)(V)=5.5, Vs(Min)(V)=1.8
U2: library part CMP-00370-122620778-1, "OPA387DBVR Ultra-high precision (2 µV), zero-drift (0.003 µV/C), low-input-bias-current op amp (single) 5-SOT-23 -40 to 125", Ambient Temperature Range High=125°C, Case/Package=SOT-23, Input Bias Current=30pA, Input Offset Voltage (Vos)=250nV, Manufacturer Lifecycle Status=ACTIVE, Max Dual Supply Voltage=2.75V, Max Junction Temperature (Tj)=150°C, Max Supply Voltage=5.5V, Min Dual Supply Voltage=850mV, Min Operating Temperature=-40°C, Min Supply Voltage=1.7V, Nominal Supply Current=570µA, Output Current per Channel=55mA, Voltage Gain=145dB, Height=1.45mm, Length=2.9mm, Lifecycle Status=Production, Max Operating Temperature=125°C, NexarPartId=122620778, Number of Channels=1, Number of Pins=5, Response Time=5.5µs, Thickness=1.2mm, Width=1.6mm
U3: library part CMP-04895-000402-1, "ULTRA-HIGH PRECISION, ZERO-DRIFT"

## Via types
v1: diameter 0.45, hole 0.3, Top layer to Bottom Layer, 258 vias
v2: diameter 0.6, hole 0.3, Top layer to Bottom Layer, 37 vias

## Nets (pads, with @x,y where several pads share a name; then routed paths per layer and width w, separated by ;. In a path a pad name is that pad's centre, name@x,y a point inside that pad or via, vN(x,y) a via of type N, cw(c..) or ccw(c..) an arc to the next point about the centre after c; other vN are vias at no path point)
+2.5V: C8.1 C10.1 C13.2 C14.1 C18.2 C19.1 FB2.2 IC1.4 U1.7 U2.5 U3.8 | length 23.2
  Top layer w0.25: C10.1 12.45,23.25 v2(13.2,22.5) 13.2,21.825 13.204,21.821 13.204,20.784 IC1.4
  Top layer w0.3: v2(11.85,34.875) 11.85,35.917 12.237,36.304 13.029,36.304 U1.7
  Top layer w0.5: U2.5 3.663,33.063 3.663,31.612 v2(3.65,31.6) 3.669,31.581 4.696,31.581 4.702,31.575 C13.2
  Bottom Layer w0.3: U3.8 v2(28.225,18.29) 28.245,18.27 29.48,18.27 C14.1
  Bottom Layer w0.5: v2(11.85,34.875) C8.1 ; C19.1 C18.2 FB2.2 ; v2(29.6,8.925) 29.6,8.898 29.571,8.869 FB2.2 ; v2(31.4,7.025) FB2.2
+2.5V_IN: FB2.1 J2.3 P8.3 | length 16.6
  Top layer w0.5: P8.3 16.544,1.446 23.946,1.446 25.42,2.92 25.42,3.67 J2.3
  Bottom Layer w0.5: J2.3 27,5.25 27,6.996 FB2.1 26.825,7.025 FB2.1@26.575,6.775
+IN_A: C4.2 IC1.3 R9.2 | length 9.5
  Top layer w0.25: v2(13.875,23.565) 13.888,23.553 13.888,20.75 IC1.3 ; C4.2 v2(15.925,27.175)
  Bottom Layer w0.25: v2@13.871,23.835 13.871,25.12 v2(15.925,27.175) ; v2(13.875,23.565) R9.2
+IN_C: C5.1 IC1.10 R8.1 R11.1 | length 11.4
  Top layer w0.25: C5.1 R11.1 ; R8.1 R11.1 ; IC1.10 12.554,14.816 12.554,13.968 9.512,10.925 R11.1
+IN_D: IC1.12 P4.2 | length 14.8
  Top layer w0.25: v2(13.875,13.05) 13.888,13.063 13.888,14.85 IC1.12
  Bottom Layer w0.25: P4.2 13.875,16.245 v2(13.875,13.05)
-1.25V_IN: C1.2 C20.2 C21.2 P8.2 R1.2 R2.2 R5.1 | length 13.8
  Top layer w0.5: P8.2 C20.2 12.7,7.3 C21.2 C1.2 14.375,7.7 14.6,7.475 15.6,7.475 15.6,7.4 R2.2 18.262,7.387 20.813,7.387 R1.2
-2.5V: C9.2 C11.1 C12.1 C15.2 C16.2 C17.1 FB1.2 IC1.11 R1.1 U1.4 U2.2 U3.4 | length 97.1
  Top layer w0.25: U2.2 C12.1 ; C11.1 12.5,12.73 12.7,12.93 v2(12.7,13.025) 13.237,13.562 13.237,14.85 IC1.11
  Top layer w0.3: U1.4 17.525,37.65 v2(17.525,41.425)
  Top layer w0.5: U2.2@2.7,35.7 U2.2 ; C12.1 2.725,37.848 2.781,37.904 2.781,38.954 3.175,39.348 v2(3.175,39.375) ; v2(20.8,9.95) 20.813,9.937 20.813,8.387 R1.1
  Bottom Layer w0.25: U3.4@26.263,12.377 26.275,12.364 26.275,11.825 C15.2
  Bottom Layer w0.3: U3.4@26.263,12.377 U3.4 U3.4@26.275,11.825
  Bottom Layer w0.5: FB1.2 C17.1 C16.2 C16.2@4.275,8.088 ; v2(17.525,41.425) 5.225,41.425 0.925,37.125 0.925,27.298 5.1,23.123 5.1,10.125 4.275,9.3 C16.2@4.275,8.088 ; C15.2 26.25,9.95 v2(20.8,9.95) 15.775,9.95 v2(12.7,13.025) 9.212,13.025 C16.2@4.275,8.088
-2.5V_IN: FB1.1 J2.1 P8.1 | length 16.8
  Bottom Layer w0.5: FB1.1 8.125,1.875 8.61,2.36 9.77,2.36 P8.1 11.66,4.25 22,4.25 J2.1
-IN_A: IC1.1 IC1.2 P2.1 R4.1 | length 8.3
  Top layer w0.25: IC1.1 IC1.2 14.55,22.925 14.775,23.15 R4.1 P2.1
-IN_B: IC1.6 R2.1 R3.2 R6.1 | length 26.7
  Top layer w0.25: v2(11.055,22.455) 11.081,22.455 11.546,21.991 11.722,21.991 11.95,21.763 IC1.6 ; R2.1 18.25,10.825 18.25,12.85 R3.2 R3.2@18.238,12.888 ; R6.1 18.238,18.412 R3.2@18.238,12.888 ; v2@19.587,12.887 R3.2@18.237,12.887
  Top layer w0.5: R3.2 R3.2@18.237,12.887
  Bottom Layer w0.25: v2(11.055,22.455) 11.055,22.445 11.975,21.525 11.975,20.525 v2(19.6,12.9)
-IN_C: C2.2 IC1.8 IC1.9 P4.1 | length 9.9
  Top layer w0.25: P4.1 7.263,20.317 7.263,16.038 C2.2 9.1,15.975 10.225,14.85 11.288,14.85 IC1.8 IC1.9
-IN_D: IC1.13 IC1.14 R12.2 | length 5.3
  Top layer w0.25: v2(14.85,12.225) 14.85,12.32 14.554,12.616 14.554,14.858 IC1.13 IC1.14
  Bottom Layer w0.25: v2(14.85,12.225) 15.76,11.315 16.16,11.315 R12.2
ADCin: C6.2 P6.1 R12.1 | length 9.2
  Top layer w0.25: C6.2 20.875,13.925 21.655,13.925 P6.1
  Bottom Layer w0.25: R12.1 19.695,11.175 P6.1
DRLout: J1.1 P7.2 R21.2 | length 16.8
  Top layer w0.25: R21.2 25.45,25.258 26.28,26.088 P7.2 27.45,27.26 27.45,36.775 28.225,37.55 J1.1 ; J1.1@28.7,37.475 J1.1 ; J1.1@29.025,37.55 J1.1
EMG+: J1.5 U1.3 | length 5.4
  Top layer w0.25: U1.3 17.546,37.021 18.303,37.021 20.05,38.768 20.05,39.375 20.825,40.15 J1.5
EMG-: J1.4 U1.2 | length 5.1
  Top layer w0.25: U1.2 17.546,36.279 18.303,36.279 20.088,34.494 20.088,34.175 20.863,33.4 J1.4
GND: C1.1 C5.2 C6.1 C8.2 C9.1 C10.2 C11.2 C12.2 C13.1 C14.2 C15.1 C16.1 C17.2 C18.1 C19.2 C20.1 C21.1 IC1.5 J2.2 P6.2 P8.4 R5.2 R9.1 R13.2 U2.3 U3.5 | length 43.5
  Top layer w0.25: v2(1.675,39.25) 1.737,39.188 1.737,37.687 C12.2 1.75,37.65 1.75,35.7 U2.3 ; v2(7.325,7.425) C5.2 ; v2(10.25,24) ccw(c10.375,24) 10.375,23.875 C10.2 11.45,23.188 12.6,22.038 IC1.5 ; C11.2 13.98,10.5 14.355,10.125 v2(14.45,10.125) 14.517,10.058 14.517,9.558 ; C6.1 19.525,16.275 21.845,16.275 P6.2 ; R13.2 32.112,27.102 32.112,28.637 v2(32.125,28.65)
  Top layer w0.5: v2(5.4,33.2) 5.419,33.181 5.419,32.781 5.85,32.35 C13.1 ; C20.1 11.3,5.4 10.294,6.406 10.294,6.631 v2(10.275,6.65) 10.275,6.675 C21.1 ; C1.1 14.431,9.156 14.431,10.106 v2(14.45,10.125) ; 14.517,9.558 R5.2 ; v2(15.175,40.275) 16.5,40.275 C9.1
  Bottom Layer w0.25: v2(10.25,24) 11.088,24.837 12.863,24.837 R9.1 ; v2(25.225,8.925) C15.1 ; C14.2 v2(31.5,18.25)
  Bottom Layer w0.3: U3.5 v2(26.275,18.265)
  Bottom Layer w0.5: C16.1 5.948,7.875 6.398,7.425 v2(7.325,7.425) 7.325,6.396 6.358,5.429 6.358,5.331 5.977,4.95 C17.2 ; v2(10.9,39.35) C8.2 ; C18.1 31.148,4.625 31.154,4.619 32.181,4.619 v2(32.2,4.6) 31.175,3.575 C19.2
  other v1: 2.1,1.35 14.1,1.35 26.1,1.35 27.1,1.35 28.1,1.35 1.6,2.35 26.6,2.35 27.6,2.35 2.1,3.35 27.1,3.35 33.1,3.35 1.6,4.35 2.6,4.35 7.6,4.35 8.6,4.35 2.1,5.35 8.1,5.35 9.1,5.35 23.1,5.35 24.1,5.35 25.1,5.35 1.6,6.35 2.6,6.35 8.6,6.35 22.6,6.35 23.6,6.35 24.6,6.35 32.6,6.35 2.1,7.35 9.1,7.35 23.1,7.35 24.1,7.35 25.1,7.35 33.1,7.35 1.6,8.35 2.6,8.35 8.6,8.35 9.6,8.35 22.6,8.35 23.6,8.35 31.6,8.35 32.6,8.35 2.1,9.35 9.1,9.35 10.1,9.35 11.1,9.35 31.1,9.35 32.1,9.35 33.1,9.35 1.6,10.35 10.6,10.35 29.6,10.35 30.6,10.35 31.6,10.35 32.6,10.35 22.1,11.35 23.1,11.35 24.1,11.35 1.6,12.35 1.6,14.35 8.6,14.35 25.6,14.35 26.6,14.35 27.6,14.35 28.6,14.35 29.6,14.35 30.1,15.35 1.6,16.35 29.6,16.35 30.6,16.35 9.1,17.35 10.1,17.35 11.1,17.35 17.1,17.35 1.6,18.35 8.6,18.35 9.6,18.35 16.6,18.35 19.6,18.35 20.6,18.35 21.6,18.35 22.6,18.35 9.1,19.35 20.1,19.35 21.1,19.35 22.1,19.35 23.1,19.35 16.6,20.35 19.6,20.35 20.6,20.35 21.6,20.35 22.6,20.35 20.1,21.35 21.1,21.35 22.1,21.35 20.6,22.35 21.6,22.35 16.1,23.35 20.1,23.35 24.1,23.35 23.6,24.35 27.6,24.35 29.6,24.35 30.6,24.35 31.6,24.35 32.6,24.35 9.1,25.35 22.1,25.35 23.1,25.35 24.1,25.35 4.6,26.35 5.6,26.35 6.6,26.35 7.6,26.35 21.6,26.35 22.6,26.35 23.6,26.35 20.1,27.35 21.1,27.35 22.1,27.35 23.1,27.35 24.1,27.35 12.6,28.35 19.6,28.35 20.6,28.35 21.6,28.35 22.6,28.35 23.6,28.35 24.6,28.35 25.6,28.35 28.6,28.35 29.6,28.35 30.6,28.35 9.1,29.35 15.1,29.35 18.1,29.35 19.1,29.35 20.1,29.35 21.1,29.35 22.1,29.35 23.1,29.35 24.1,29.35 25.1,29.35 26.1,29.35 29.1,29.35 30.1,29.35 9.6,30.35 18.6,30.35 19.6,30.35 20.6,30.35 21.6,30.35 22.6,30.35 23.6,30.35 24.6,30.35 25.6,30.35 28.6,30.35 29.6,30.35 30.6,30.35 31.6,30.35 32.6,30.35 7.1,31.35 15.1,31.35 18.1,31.35 19.1,31.35 20.1,31.35 21.1,31.35 22.1,31.35 23.1,31.35 24.1,31.35 25.1,31.35 26.1,31.35 29.1,31.35 30.1,31.35 31.1,31.35 32.1,31.35 33.1,31.35 23.6,32.35 28.6,32.35 29.6,32.35 30.6,32.35 31.6,32.35 32.6,32.35 7.1,33.35 29.1,33.35 30.1,33.35 31.1,33.35 32.1,33.35 33.1,33.35 6.6,34.35 28.6,34.35 29.6,34.35 30.6,34.35 31.6,34.35 32.6,34.35 6.1,35.35 15.1,35.35 21.1,35.35 22.1,35.35 23.1,35.35 24.1,35.35 26.1,35.35 29.1,35.35 30.1,35.35 31.1,35.35 32.1,35.35 33.1,35.35 6.6,36.35 15.6,36.35 20.6,36.35 21.6,36.35 22.6,36.35 23.6,36.35 24.6,36.35 25.6,36.35 31.6,36.35 32.6,36.35 15.1,37.35 21.1,37.35 22.1,37.35 23.1,37.35 24.1,37.35 25.1,37.35 26.1,37.35 31.1,37.35 32.1,37.35 33.1,37.35 14.6,38.35 15.6,38.35 23.6,38.35 31.6,38.35 32.6,38.35 5.1,39.35 6.1,39.35 7.1,39.35 8.1,39.35 9.1,39.35 13.1,39.35 14.1,39.35 31.1,39.35 32.1,39.35 33.1,39.35 26.6,40.35 27.6,40.35 28.6,40.35 29.6,40.35 30.6,40.35 31.6,40.35 32.6,40.35 2.1,41.35 3.1,41.35 24.1,41.35 26.1,41.35 27.1,41.35 28.1,41.35 29.1,41.35 30.1,41.35 31.1,41.35 32.1,41.35
NetC2_1: C2.1 R7.1 R8.2 R10.1 R11.2 | length 9.7
  Top layer w0.25: R7.1 4.037,10.913 6.312,10.913 R11.2 R8.2 ; R10.1 R8.2 ; C2.1 R8.2
NetC3_1: C3.1 P1.2 | length 5.9
  Top layer w0.25: P1.2 11.495,32.805 C3.1
NetC3_2: C3.2 C4.1 R4.2 | length 4.7
  Top layer w0.25: R4.2 C4.1 C3.2
NetC7_1: C7.1 R15.1 | length 1.8
  Top layer w0.25: R15.1 C7.1
NetC7_2: C7.2 R14.1 R16.1 U2.4 | length 8.4
  Top layer w0.3: U2.4 C7.2 1.85,31.1 2.475,31.1 4.2,29.375 R16.1 R14.1
NetC22_1: C22.1 R17.2 | length 2.1
  Bottom Layer w0.25: R17.2 30.865,22.8 32.935,22.8 C22.1
NetC22_2: C22.2 R18.2 R20.2 U3.6 | length 15.4
  Top layer w0.25: v2(25.325,20.415) 25.337,20.428 29.487,20.428 v2(29.5,20.44)
  Bottom Layer w0.25: v2(25.325,20.415) R18.2 26.725,19.175 26.954,18.946 26.954,17.906 26.925,17.877 U3.6 ; v2(29.5,20.44) R20.2 30.837,20.452 30.837,21.14 31.471,21.774 32.945,21.774 33.579,22.408 33.579,22.444 C22.2
NetP1_1: P1.1 P5.2 U1.6 | length 11.9
  Top layer w0.3: P1.1 10.455,36.975 U1.6
  Bottom Layer w0.25: P1.1 11.075,33.095 P5.2
NetP2_2: P2.2 R6.2 | length 2.9
  Top layer w0.25: R6.2 P2.2
NetP3_2: P3.2 R7.2 R10.2 | length 9.8
  Top layer w0.25: P3.2 3.05,20.555 3.05,13.575 R10.2 R7.2
NetP5_1: P5.1 R14.2 | length 4.2
  Top layer w0.25: R14.2 9.12,26.78 P5.1
NetP7_1: P7.1 R13.1 | length 3.3
  Top layer w0.25: P7.1 R13.1
NetP9_1: P9.1 R20.1 | length 6.2
  Bottom Layer w0.25: R20.1 31.825,19.59 32.625,18.79 32.625,15.659 32.025,15.059 P9.1 P9.1@32.075,14.96
NetP9_2: P9.2 U3.1 U3.2 | length 4.5
  Bottom Layer w0.25: U3.2 U3.1 28.244,12.37 P9.2
NetR17_1: R17.1 R18.1 R21.1 U3.7 | length 10
  Top layer w0.25: R21.1 26.462,22.802 28.337,22.802 v2(28.35,22.79)
  Bottom Layer w0.25: U3.7 27.575,17.98 27.546,18.009 27.546,20.236 R18.1 28.35,21.04 v2(28.35,22.79) 28.353,22.787 29.847,22.787 R17.1
NetR19_1: R19.1 R22.1 U3.3 | length 33.4
  Top layer w0.25: R19.1 R22.1 16.55,29.25 24.3,21.5 24.3,12.915 v2(27.5,9.715)
  Bottom Layer w0.25: U3.3 26.925,10.29 v2(27.5,9.715)
OUT_B: IC1.7 P3.1 R3.1 | length 24.7
  Top layer w0.25: P3.1 4.129,24.374 8.177,24.374 11.3,21.251 IC1.7 10.487,20.738 v2(9.875,21.35) ; v2(15.825,12.875) R3.1
  Bottom Layer w0.25: v2(9.875,21.35) 15.825,15.4 v2(15.825,12.875)
RG1: R22.2 U1.1 | length 2.5
  Top layer w0.25: U1.1 17.55,35.625 R22.2
RG2: R19.2 U1.8 | length 2.5
  Top layer w0.25: R19.2 U1.8
ServoOut: R15.2 R16.2 U1.5 U2.1 | length 26.6
  Top layer w0.25: v2(2.8,27.1) 2.788,27.112 R15.2@2.788,28.387 ; U2.1 3.729,35.729 3.729,35.928 3.85,36.049 4.449,36.049 v2(5.175,36.775) ; U2.1@3.729,36.049 3.729,36.454 4.9,37.625 U1.5 ; R16.2 4.988,28.387 R15.2@2.788,28.387 ; R15.2@2.788,28.387 R15.2 R15.2@2.788,28.387
  Bottom Layer w0.25: v2@2.825,27 4.525,28.7 4.525,36.125 v2(5.175,36.775)
pads on no net: J1.MH1 J1.MH2

## Polygon pours and split planes (outlines as drawn)
GND on Bottom Layer "GND_L04_P000" (solid, pour order 0): 32.21,42.75 cw(c32.21,40.21) 34.75,40.21 34.75,2.54 cw(c32.21,2.54) 32.21,0 2.54,0 cw(c2.54,2.54) 0,2.54 0,40.21 cw(c2.54,40.21) 2.54,42.75 22.75,42.75
GND on Top layer "GND_L01_P001" (solid, pour order 1): 32.21,42.75 cw(c32.21,40.21) 34.75,40.21 34.75,2.54 cw(c32.21,2.54) 32.21,0 2.54,0 cw(c2.54,2.54) 0,2.54 0,40.21 cw(c2.54,40.21) 2.54,42.75 19,42.75
+2.5V on Power (split plane): 32.409,42.232 32.606,42.203 32.8,42.154 32.988,42.087 33.168,42.002 33.339,41.899 33.499,41.781 33.647,41.647 33.781,41.499 33.899,41.339 34.002,41.168 34.087,40.988 34.154,40.8 34.203,40.606 34.232,40.409 34.241,40.226 34.24,40.21 34.24,2.54 34.241,2.524 34.232,2.341 34.203,2.144 34.154,1.95 34.087,1.762 34.002,1.582 33.899,1.411 33.781,1.251 33.647,1.103 33.499,0.969 33.339,0.851 33.168,0.748 32.988,0.663 32.8,0.596 32.606,0.547 32.409,0.518 32.226,0.509 32.21,0.51 2.54,0.51 2.524,0.509 2.341,0.518 2.144,0.547 1.95,0.596 1.762,0.663 1.582,0.748 1.411,0.851 1.251,0.969 1.103,1.103 0.969,1.251 0.851,1.411 0.748,1.582 0.663,1.762 0.596,1.95 0.547,2.144 0.518,2.341 0.509,2.524 0.51,2.54 0.51,29.25 0.51,40.21 0.509,40.226 0.518,40.409 0.547,40.606 0.596,40.8 0.663,40.988 0.748,41.168 0.851,41.339 0.969,41.499 1.103,41.647 1.251,41.781 1.411,41.899 1.582,42.002 1.762,42.087 1.95,42.154 2.144,42.203 2.341,42.232 2.524,42.241 2.54,42.24 32.21,42.24 32.226,42.241
GND on Ground (split plane): 32.409,42.232 32.606,42.203 32.8,42.154 32.988,42.087 33.168,42.002 33.339,41.899 33.499,41.781 33.647,41.647 33.781,41.499 33.899,41.339 34.002,41.168 34.087,40.988 34.154,40.8 34.203,40.606 34.232,40.409 34.241,40.226 34.24,40.21 34.24,2.54 34.241,2.524 34.232,2.341 34.203,2.144 34.154,1.95 34.087,1.762 34.002,1.582 33.899,1.411 33.781,1.251 33.647,1.103 33.499,0.969 33.339,0.851 33.168,0.748 32.988,0.663 32.8,0.596 32.606,0.547 32.409,0.518 32.226,0.509 32.21,0.51 2.54,0.51 2.524,0.509 2.341,0.518 2.144,0.547 1.95,0.596 1.762,0.663 1.582,0.748 1.411,0.851 1.251,0.969 1.103,1.103 0.969,1.251 0.851,1.411 0.748,1.582 0.663,1.762 0.596,1.95 0.547,2.144 0.518,2.341 0.509,2.524 0.51,2.54 0.51,29.25 0.51,40.21 0.509,40.226 0.518,40.409 0.547,40.606 0.596,40.8 0.663,40.988 0.748,41.168 0.851,41.339 0.969,41.499 1.103,41.647 1.251,41.781 1.411,41.899 1.582,42.002 1.762,42.087 1.95,42.154 2.144,42.203 2.341,42.232 2.524,42.241 2.54,42.24 32.21,42.24 32.226,42.241

## Silkscreen, mask and mechanical layers (free items; w line width, h text height)
Top Overlay:
  text "DSLDR if 8VCM" at 21.35,19.85 h0.8
Bottom Overlay:
  text "sEMG AFE v1.0" at 22.85,33.65 h1
  text "Fenger" at 22.6,32.417 h0.8